# Altium PCB Memory_EEPROM.PcbDoc
Units mil, origin at the board's own origin, x right, y up, seen from the top; angles counter-clockwise.
Board outline 5200 x 2300 mil, 2 copper layers (Top Layer, Bottom Layer); 9 components, 50 nets, 113 pads, 193 vias.
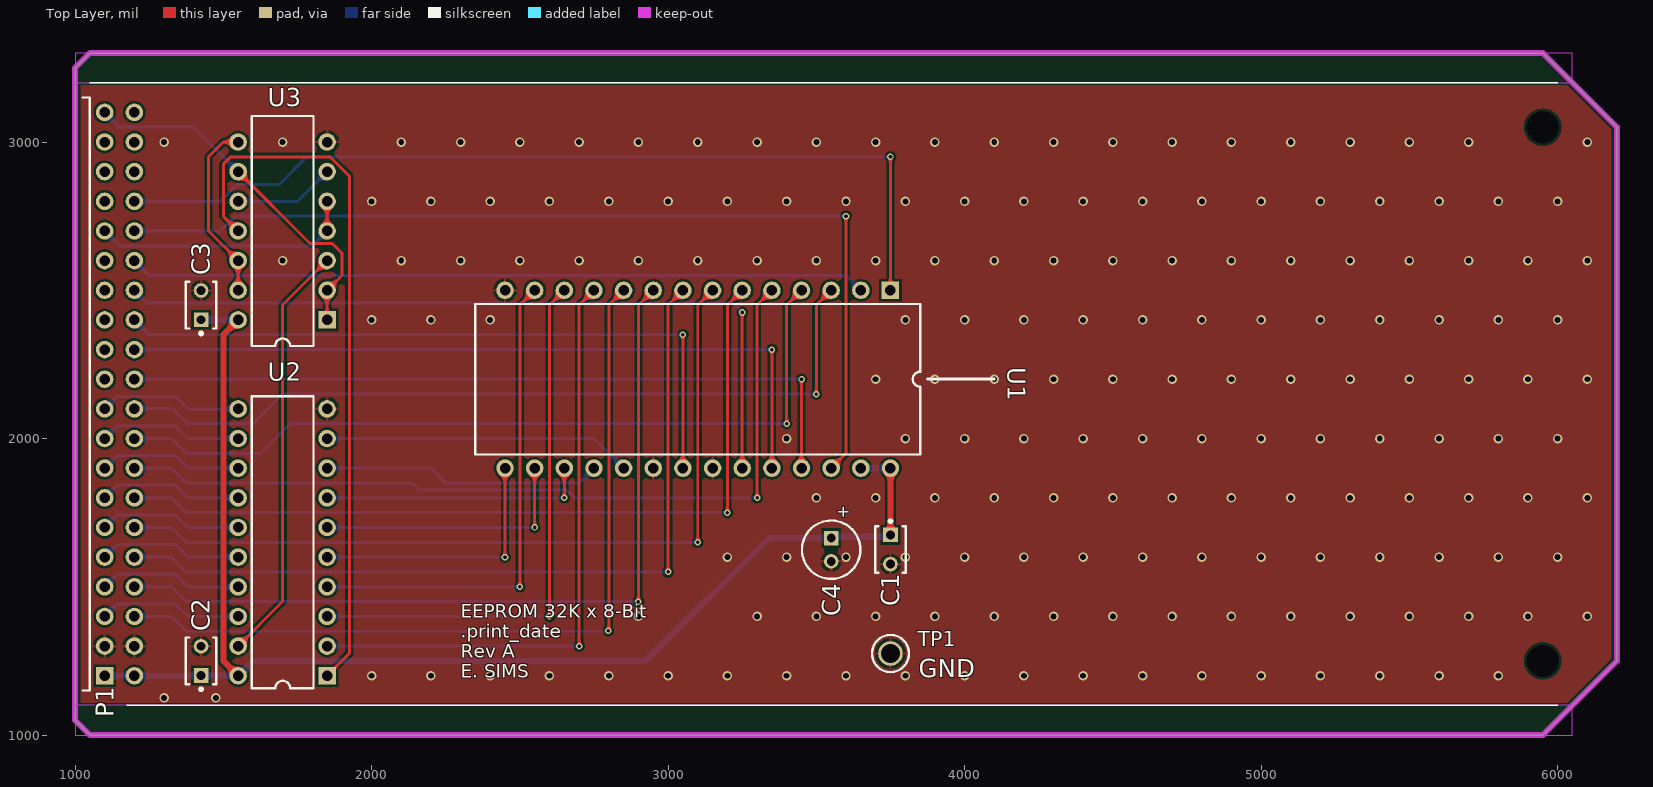
[diagram p0: Top Layer view]
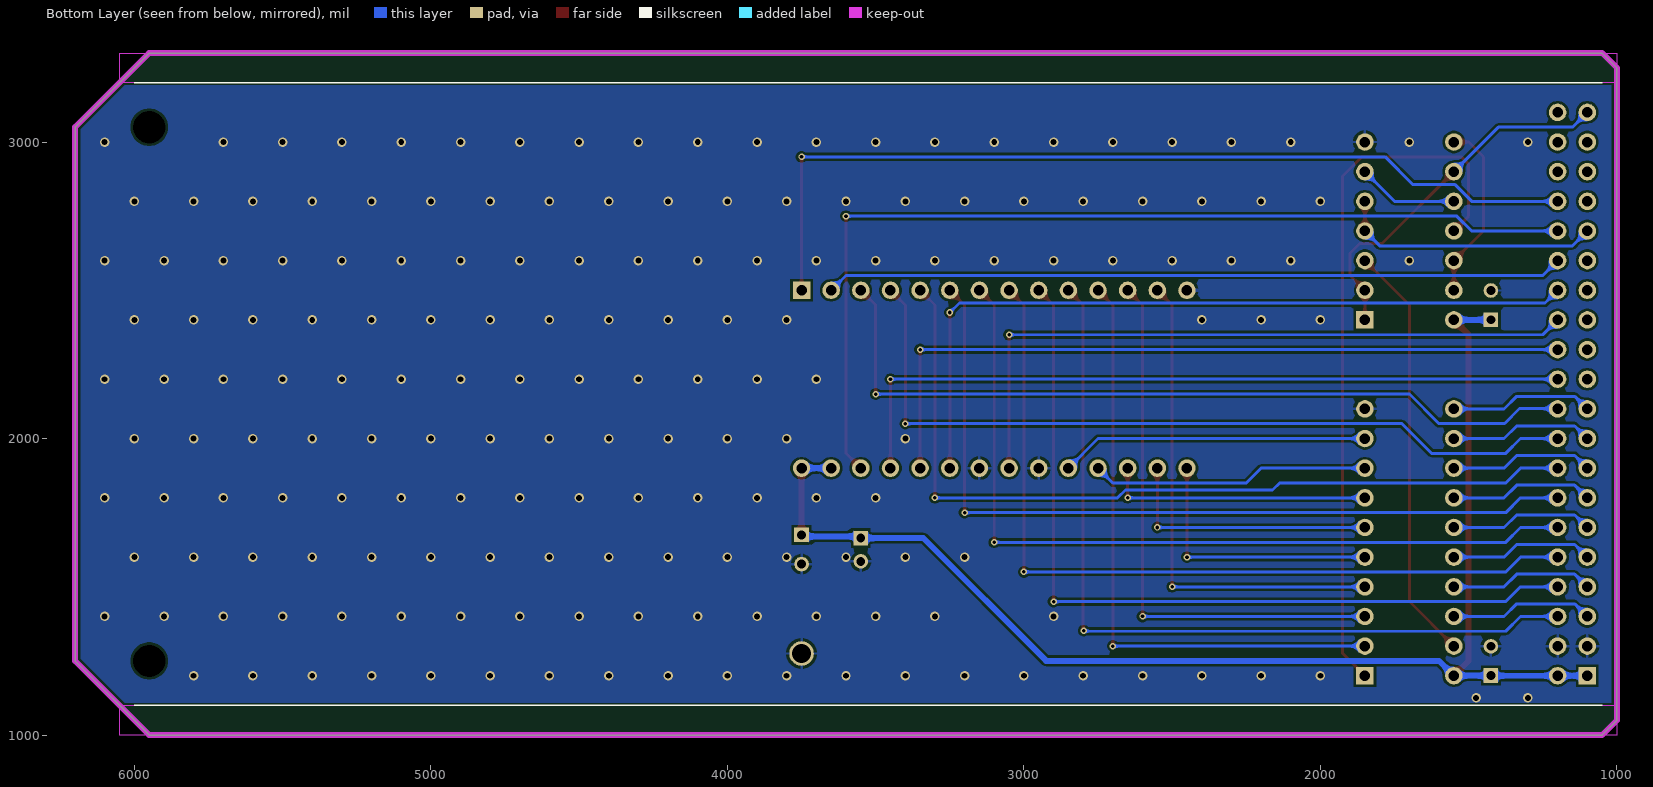
[diagram p1: Bottom Layer view, seen from below]

## Layer stack, top to bottom
Top Solder: solder mask 0.4, Solder Resist, Dk 3.5
Top Layer: signal copper 1.4
Dielectric 1: dielectric 12.6, FR-4, Dk 4.8
Bottom Layer: signal copper 1.4
Bottom Solder: solder mask 0.4, Solder Resist, Dk 3.5

## Board outline
1050,1000 1000,1050 1000,3250 1050,3300 5950,3300 6200,3050 6200,1250 5950,1000

## Design rules (kind name [scope] priority, off if disabled: settings)
Clearance [All] p1: gap=8 ignorepadtopadclearanceinfootprint=FALSE
HoleSize [All] p1: absolutevalues=TRUE maxlimit=200 minlimit=10 maxpercent=80.000 minpercent=20.000
PolygonConnect [All] p1: thpad.connectstyle=Relief thpad.reliefconductorwidth=10 thpad.reliefentries=4 thpad.polygonreliefangle="90 Angle" thpad.airgapwidth=10 smdpad.connectstyle=Relief smdpad.reliefconductorwidth=10 smdpad.reliefentries=4 smdpad.polygonreliefangle="90 Angle" smdpad.airgapwidth=10 via.connectstyle=Direct via.reliefconductorwidth=10 via.reliefentries=4 via.polygonreliefangle="90 Angle" via.airgapwidth=10
RoutingVias "Schematic Routing Via Style" [InNet('GND')] p1: holewidth=20 width=35 viastyle="Through Hole" minholewidth=20 minwidth=35 maxholewidth=20 maxwidth=50
RoutingVias [All] p2: holewidth=28 width=50 viastyle="Through Hole" minholewidth=28 minwidth=50 maxholewidth=28 maxwidth=50
SilkToSilkClearance [All] p1: silktosilkclearance=5
SilkToSolderMaskClearance [IsPad] p1: minsilkscreentomaskgap=5 clearancetoexposedcopper=FALSE
SolderMaskExpansion [All] p1: expansion=4 istentingtop=FALSE
Width "Schematic Width Constraint" [InNet('GND')] p1: maxlimit=50 minlimit=20 preferedwidth=20
Width [All] p2: maxlimit=20 minlimit=10 preferedwidth=10 minimp=50.000000 maximp=50.000000 favimp=50.000000
27 further rules are at their usual default settings.

## Classes and differential pairs
net class PWR: GND
net class BUS[0..7]: BUS0 BUS1 BUS2 BUS3 BUS4 BUS5 BUS6 BUS7
net class ADDR[0..14]: ADDR0 ADDR1 ADDR2 ADDR3 ADDR4 ADDR5 ADDR6 ADDR7 ADDR8 ADDR9 ADDR10 ADDR11 ADDR12 ADDR13 ADDR14
component class Top: C4 P1 TP1
component class MEM: C1 C2 C3 U1 U2 U3

## Components (designator, comment, footprint, x,y, rotation, side; value= is the part's Value field where it differs from the comment)
C1 "K104K15X7RF5TL2" VISH-K104K15X7RF5TL2 3750,1625.79 r270 top
C2 "K104K15X7RF5TL2" VISH-K104K15X7RF5TL2 1425,1250 r90 top
C3 "K104K15X7RF5TL2" VISH-K104K15X7RF5TL2 1425,2450 r90 top
C4 "Cap Pol5" C5x7 3550,1625 r270 top value=10uF
P1 "Header 20X2H" HDR2X20H 1100,1200 r90 top locked
TP1 "GND" KSTN-5011_V 3750,1275 r0 top
U1 "AT28C256-15PU" J028 3100,2200 r180 top
U2 "SN74LS245N" N020 1700,1650 r90 top
U3 "SN74LS00N" N014 1700,2700 r90 top

## Footprints (in the part's own frame and the unit in brackets; to place one, negate y for a bottom-side part, rotate by r counter-clockwise, add the part's x,y. Pads: shape width x height; smd on the part's side, far side on the other; paste and mask are expansions set on the pad)
C5x7 [mm] "Capacitor; 2 Leads"
  rect 1.25x1.25 hole 0.75: 1(-1,0)
  round 1.25 hole 0.75: 2(1,0)
  silkscreen extent -2.5,-2.5 2.5,2.5, body extent -2.5,-2.5 2.5,2.5, height 7
HDR2X20H [mm] "Connector; Header; 20x2 Position; Right Angle"
  rect 1.5x1.5 hole 0.9: 1(0,0)
  round 1.5 hole 0.9: 2(0,-2.54) 3(2.54,0) 4(2.54,-2.54) 5(5.08,0) 6(5.08,-2.54) 7(7.62,0) 8(7.62,-2.54) 9(10.16,0) 10(10.16,-2.54) 11(12.7,0) 12(12.7,-2.54) 13(15.24,0) 14(15.24,-2.54) 15(17.78,0) 16(17.78,-2.54) 17(20.32,0) 18(20.32,-2.54) 19(22.86,0) 20(22.86,-2.54) 21(25.4,0) 22(25.4,-2.54) 23(27.94,0) 24(27.94,-2.54) 25(30.48,0) 26(30.48,-2.54) 27(33.02,0) 28(33.02,-2.54) 29(35.56,0) 30(35.56,-2.54) 31(38.1,0) 32(38.1,-2.54) 33(40.64,0) 34(40.64,-2.54) 35(43.18,0) 36(43.18,-2.54) 37(45.72,0) 38(45.72,-2.54) 39(48.26,0) 40(48.26,-2.54)
  silkscreen extent -1.27,1.27 49.53,1.91
J028 [mm] "DIP; 28 Leads; Row Spacing 15.24 mm; Pitch 2.54 mm"
  rect 1.5x1.5 hole 0.9: 1(-16.51,-7.62)
  round 1.5 hole 0.9: 2(-13.97,-7.62) 3(-11.43,-7.62) 4(-8.89,-7.62) 5(-6.35,-7.62) 6(-3.81,-7.62) 7(-1.27,-7.62) 8(1.27,-7.62) 9(3.81,-7.62) 10(6.35,-7.62) 11(8.89,-7.62) 12(11.43,-7.62) 13(13.97,-7.62) 14(16.51,-7.62) 15(16.51,7.62) 16(13.97,7.62) 17(11.43,7.62) 18(8.89,7.62) 19(6.35,7.62) 20(3.81,7.62) 21(1.27,7.62) 22(-1.27,7.62) 23(-3.81,7.62) 24(-6.35,7.62) 25(-8.89,7.62) 26(-11.43,7.62) 27(-13.97,7.62) 28(-16.51,7.62)
  silkscreen extent -19.05,-6.45 19.05,6.45
KSTN-5011_V [mm] "Test Point, Dia 3.17mm"
  round 2.1 hole 1.6: 1(0,0)
  silkscreen extent -1.59,-1.58 1.59,1.58, body extent -1.59,-1.59 1.59,1.59, height 8.13
N014 [mm] "DIP; 14 Leads; Row Spacing 7.62 mm; Pitch 2.54 mm"
  rect 1.5x1.5 hole 0.9: 1(-7.62,-3.81)
  round 1.5 hole 0.9: 2(-5.08,-3.81) 3(-2.54,-3.81) 4(0,-3.81) 5(2.54,-3.81) 6(5.08,-3.81) 7(7.62,-3.81) 8(7.62,3.81) 9(5.08,3.81) 10(2.54,3.81) 11(0,3.81) 12(-2.54,3.81) 13(-5.08,3.81) 14(-7.62,3.81)
  silkscreen extent -9.85,-2.65 9.85,2.65, body extent -9.15,-5.08 9.15,5.12, height 7.88
N020 [mm] "DIP; 20 Leads; Row Spacing 7.62 mm; Pitch 2.54 mm"
  rect 1.5x1.5 hole 0.9: 1(-11.43,-3.81)
  round 1.5 hole 0.9: 2(-8.89,-3.81) 3(-6.35,-3.81) 4(-3.81,-3.81) 5(-1.27,-3.81) 6(1.27,-3.81) 7(3.81,-3.81) 8(6.35,-3.81) 9(8.89,-3.81) 10(11.43,-3.81) 11(11.43,3.81) 12(8.89,3.81) 13(6.35,3.81) 14(3.81,3.81) 15(1.27,3.81) 16(-1.27,3.81) 17(-3.81,3.81) 18(-6.35,3.81) 19(-8.89,3.81) 20(-11.43,3.81)
  silkscreen extent -12.5,-2.65 12.5,2.65, body extent -13.08,-5.08 13.08,5.12, height 7.88
VISH-K104K15X7RF5TL2 [mm] "THD, 2-Leads, Body 4x2.6mm"
  rect 1.25x1.25 hole 0.75: 1(-1.25,0)
  round 1.25 hole 0.75: 2(1.25,0)
  silkscreen extent -2.55,-1.3 2,1.3, body extent -2,-1.3 2,1.3, height 5.6

## Part data
C1 C2 C3: library part CMP-2000-06508-1, "Ceramic Capacitor, 100 nF, +/- 10%, 50 V, -55 to 125 degC, 2-Pin THD, RoHS, Tape and Reel", Capacitance=0.1µF, Manufacturer=Vishay, Operating Temperature=-55°C~125°C, Package / Case=Radial, Package Description="2-Pin Through Hole Device, Body 4 x 2.6 mm", Ratings=-, Standard Package=1, Temperature Coefficient=X7R, Tolerance=±10%, Voltage - Rated=50V, Applications=GeneralPurpose, Catalog Drawings=Mono-KapSide2-15_5.58Mono-KapSide1_15, Category=Capacitors, Datasheet URL=http://www.vishay.com/docs/45171/kseries.pdf, Datasheet Version=08/2013, Family=CeramicCapacitors, Features=-, Height - Seated (Max)="0.220\"(5.58mm)", Lead Spacing="0.098\"(2.50mm)", Lead Style=Straight, Manufacturer URL=http://www.vishay.com/, Mounting Technology=ThroughHole, Mounting Type=ThroughHole, Online Catalog=Mono-Kap™Series, Other Names=BC1084CT, Package Reference=K104K15X7RF5TL2, Packaging=CutTape(CT), Series=Mono-Kap™K, Size / Dimension="0.157\"Lx0.098\"W(4.00mmx2.50mm)", Thickness (Max)=-
C4: "Polarized Capacitor", LatestRevisionDate=17-Jul-2002, LatestRevisionNote="Re-released for DXP Platform.", PackageDescription="Polarized Capacitor; 2 Leads", PackageReference=POLAR0.8, Published=8-Jun-2000, Publisher="Altium Limited"
P1: "Header, 20-Pin, Dual row, Right Angle", LatestRevisionDate=17-Jul-2002, LatestRevisionNote="Re-released for DXP Platform.", Publisher="Altium Limited", System=Connector
TP1: library part TP
U2: "Octal Bus Transceiver with 3-State Outputs", ComponentLink1Description="Manufacturer Link", ComponentLink1URL=http://www.ti.com/, ComponentLink2Description=Datasheet, ComponentLink2URL=http://www-s.ti.com/sc/ds/sn74ls245.pdf, DatasheetVersion=Mar-1988, LatestRevisionDate=04-Mar-2005, LatestRevisionNote="Stylized 3D Model Added.", PackageDescription="DIP; 20 Leads; Row Spacing 7.62 mm; Pitch 2.54 mm", PackageReference=N020, PackageVersion=Oct-1995, Published=8-Jun-2000, Publisher="Altium Limited"
U3: "Quadruple 2-Input Positive-NAND Gate", ComponentLink1Description="Manufacturer Link", ComponentLink1URL=http://www.ti.com/, ComponentLink2Description=Datasheet, ComponentLink2URL=http://www-s.ti.com/sc/ds/sn74ls00.pdf, DatasheetVersion=Mar-1988, LatestRevisionDate=04-Mar-2005, LatestRevisionNote="Stylized 3D Model Added.", PackageDescription="DIP; 14 Leads; Row Spacing 7.62 mm; Pitch 2.54 mm", PackageReference=N014, PackageVersion=Oct-1995, Published=8-Jun-2000, Publisher="Altium Limited"

## Free pads (board coordinates)
  round 0 hole 109: ""(5950,1250) ""(5950,3050)

## Via types
v1: diameter 32, hole 20, Top Layer to Bottom Layer, tented both sides, 173 vias
v2: diameter 22, hole 12, Top Layer to Bottom Layer, tented both sides, 20 vias

## Nets (pads, with @x,y where several pads share a name; then routed paths per layer and width w, separated by ;. In a path a pad name is that pad's centre, name@x,y a point inside that pad or via, vN(x,y) a via of type N, cw(c..) or ccw(c..) an arc to the next point about the centre after c; other vN are vias at no path point)
ADDR0: P1.6 U1.10 | length 2789.6
  Top Layer w10: v2@2800,1351.85 2800,2450 U1.10
  Bottom Layer w10: P1.6 1325,1400 1375,1350 v2@2800,1350
  other v2: 2798.57,1351.85
ADDR1: P1.8 U1.9 | length 2791.4
  Top Layer w10: v2(2900,1450) 2900,2450 U1.9
  Bottom Layer w10: P1.8 1325,1500 1375,1450 v2(2900,1450)
ADDR2: P1.10 U1.8 | length 2791.4
  Top Layer w10: v2(3000,1550) 3000,2450 U1.8
  Bottom Layer w10: P1.10 1325,1600 1375,1550 v2(3000,1550)
ADDR3: P1.12 U1.7 | length 2791.4
  Top Layer w10: v2(3100,1650) 3100,2450 U1.7
  Bottom Layer w10: P1.12 1325,1700 1375,1650 v2(3100,1650)
ADDR4: P1.14 U1.6 | length 2791.4
  Top Layer w10: v2(3200,1750) 3200,2450 U1.6
  Bottom Layer w10: P1.14 1325,1800 1375,1750 v2(3200,1750)
ADDR5: P1.16 U1.5 | length 2862.1
  Top Layer w10: v2(3300,1800) 3300,2450 U1.5
  Bottom Layer w10: P1.16 1325,1900 1375,1850 2137.5,1850 2161.35,1826.15 2657.79,1826.15 2683.94,1800 v2(3300,1800)
ADDR6: P1.18 U1.4 | length 2732.8
  Top Layer w10: v2(3400,2050) 3400,2450 U1.4
  Bottom Layer w10: P1.18 1325,2000 1375,1950 1625,1950 1725,2050 v2(3400,2050)
ADDR7: P1.20 U1.3 | length 2728.8
  Top Layer w10: v2(3500,2150) 3500,2450 U1.3
  Bottom Layer w10: P1.20@1203.57,2101.08 1328.57,2101.08 1378.57,2051.08 1601.08,2051.08 1700,2150 v2(3500,2150)
ADDR8: P1.22 U1.25 | length 2550
  Top Layer w10: U1.25 v2(3450,2200)
  Bottom Layer w10: P1.22 v2(3450,2200)
ADDR9: P1.24 U1.24 | length 2550
  Top Layer w10: U1.24 v2(3350,2300)
  Bottom Layer w10: P1.24 v2(3350,2300)
ADDR10: P1.26 U1.21 | length 2320.7
  Top Layer w10: U1.21 v2(3050,2350)
  Bottom Layer w10: P1.26 1250,2350 v2(3050,2350)
ADDR11: P1.28 U1.23 | length 2606.1
  Top Layer w10: U1.23 v2(3250,2425)
  Bottom Layer w10: P1.28 1242.53,2457.47 3217.53,2457.47 v2(3250,2425)
ADDR12: P1.30 U1.2 | length 2491.4
  Bottom Layer w10: P1.30 1250,2550 3600,2550 U1.2
ADDR13: P1.32 U1.26 | length 3291.4
  Top Layer w10: U1.26 3600,1950 v2(3600,2750)
  Bottom Layer w10: P1.32 1489.86,2700 1539.86,2750 v2(3600,2750)
ADDR14: P1.34 U1.1 | length 3062.1
  Top Layer w10: U1.1 v2(3750,2950)
  Bottom Layer w10: P1.34 1489.86,2800 1547.33,2857.47 1689.11,2857.47 1781.64,2950 v2(3750,2950)
ADDR15: P1.36
ADDR16: P1.38
ADDR17: P1.40
ADDR18: P1.21
ADDR19: P1.23
BUS0: P1.5 U2.18 | length 485.2
  Bottom Layer w10: P1.5 1142.53,1442.53 1338.29,1442.53 1380.82,1400 U2.18
BUS1: P1.7 U2.17 | length 485.2
  Bottom Layer w10: P1.7 1142.53,1542.53 1338.29,1542.53 1380.82,1500 U2.17
BUS2: P1.9 U2.16 | length 485.2
  Bottom Layer w10: P1.9 1142.53,1642.53 1338.29,1642.53 1380.82,1600 U2.16
BUS3: P1.11 U2.15 | length 485.2
  Bottom Layer w10: P1.11 1142.53,1742.53 1338.29,1742.53 1380.82,1700 U2.15
BUS4: P1.13 U2.14 | length 485.2
  Bottom Layer w10: P1.13 1142.53,1842.53 1338.29,1842.53 1380.82,1800 U2.14
BUS5: P1.15 U2.13 | length 485.2
  Bottom Layer w10: P1.15 1142.53,1942.53 1338.29,1942.53 1380.82,1900 U2.13
BUS6: P1.17 U2.12 | length 485.2
  Bottom Layer w10: P1.17 1142.53,2042.53 1338.29,2042.53 1380.82,2000 U2.12
BUS7: P1.19 U2.11 | length 485.2
  Bottom Layer w10: P1.19 1142.53,2142.53 1338.29,2142.53 1380.82,2100 U2.11
CLK: P1.37
EN: P1.39 U3.1 U3.2 U3.9 | length 1242.5
  Top Layer w10: U3.9 1792.53,2657.47 1867.53,2657.47 1900,2625 1900,2550 U3.2 U3.1
  Bottom Layer w10: P1.39 1150,3050 1400,3050 U3.9
GND: C1.2 C2.2 C3.2 C4.2 P1.3 P1.4 TP1.1 U1.14 U1.20 U1.22 U2.10 U3.7
  other v1: 1300,1125 1475,1125 2000,1200 2200,1200 2400,1200 2600,1200 2800,1200 3000,1200 3200,1200 3400,1200 3600,1200 3800,1200 4000,1200 4200,1200 4400,1200 4600,1200 4800,1200 5000,1200 5200,1200 5400,1200 5600,1200 5800,1200 2900,1400 3300,1400 3500,1400 3700,1400 3900,1400 4100,1400 4300,1400 4500,1400 4700,1400 4900,1400 5100,1400 5300,1400 5500,1400 5700,1400 5900,1400 6100,1400 3200,1600 3400,1600 3600,1600 3800,1600 4000,1600 4200,1600 4400,1600 4600,1600 4800,1600 5000,1600 5200,1600 5400,1600 5600,1600 5800,1600 6000,1600 3500,1800 3700,1800 3900,1800 4100,1800 4300,1800 4500,1800 4700,1800 4900,1800 5100,1800 5300,1800 5500,1800 5700,1800 5900,1800 6100,1800 3400,2000 3800,2000 4000,2000 4200,2000 4400,2000 4600,2000 4800,2000 5000,2000 5200,2000 5400,2000 5600,2000 5800,2000 6000,2000 3700,2200 3900,2200 4100,2200 4300,2200 4500,2200 4700,2200 4900,2200 5100,2200 5300,2200 5500,2200 5700,2200 5900,2200 6100,2200 2000,2400 2200,2400 2400,2400 3800,2400 4000,2400 4200,2400 4400,2400 4600,2400 4800,2400 5000,2400 5200,2400 5400,2400 5600,2400 5800,2400 6000,2400 1700,2600 2100,2600 2300,2600 2500,2600 2700,2600 2900,2600 3100,2600 3300,2600 3500,2600 3700,2600 3900,2600 4100,2600 4300,2600 4500,2600 4700,2600 4900,2600 5100,2600 5300,2600 5500,2600 5700,2600 5900,2600 6100,2600 2000,2800 2200,2800 2400,2800 2600,2800 2800,2800 3000,2800 3200,2800 3400,2800 3600,2800 3800,2800 4000,2800 4200,2800 4400,2800 4600,2800 4800,2800 5000,2800 5200,2800 5400,2800 5600,2800 5800,2800 6000,2800 1300,3000 1700,3000 2100,3000 2300,3000 2500,3000 2700,3000 2900,3000 3100,3000 3300,3000 3500,3000 3700,3000 3900,3000 4100,3000 4300,3000 4500,3000 4700,3000 4900,3000 5100,3000 5300,3000 5500,3000 5700,3000 6100,3000
LOAD: P1.33
NetU2_1: U2.1 U3.11 | length 2424.1
  Top Layer w10: U3.11 1500,2750 1500,2925 1525,2950 1860.14,2950 1925,2885.14 1925,1275 U2.1
NetU2_19: U2.19 U3.3 | length 1424.3
  Top Layer w10: U2.19 1700,1450 1700,2450 U3.3
NetU3_6: U3.6 U3.10 | length 341.4
  Bottom Layer w10: U3.10 1750,2800 U3.6
NetU3_8: U3.8 U3.12 U3.13 | length 612.1
  Top Layer w10: U3.13 U3.12 1450,2700 1450,2950 1500,3000 U3.8
OUT#: P1.31 U3.4 U3.5 | length 891.4
  Top Layer w10: U3.4 U3.5
  Bottom Layer w10: P1.31 1150,2650 1800,2650 U3.4
REG0: U1.11 U2.2 | length 2070.7
  Top Layer w10: v2(2700,1300) 2700,2450 U1.11
  Bottom Layer w10: U2.2 v2(2700,1300)
REG1: U1.12 U2.3 | length 1870.7
  Top Layer w10: v2(2600,1400) 2600,2450 U1.12
  Bottom Layer w10: U2.3 v2(2600,1400)
REG2: U1.13 U2.4 | length 1670.7
  Top Layer w10: v2(2500,1500) 2500,2450 U1.13
  Bottom Layer w10: U2.4 v2(2500,1500)
REG3: U1.15 U2.5 | length 900
  Top Layer w10: v2(2450,1600) U1.15
  Bottom Layer w10: U2.5 v2(2450,1600)
REG4: U1.16 U2.6 | length 900
  Top Layer w10: v2(2550,1700) U1.16
  Bottom Layer w10: U2.6 v2(2550,1700)
REG5: U1.17 U2.7 | length 900
  Top Layer w10: v2(2650,1800) U1.17
  Bottom Layer w10: U2.7 v2(2650,1800)
REG6: U1.18 U2.8 | length 941.4
  Bottom Layer w10: U2.8 2200,1900 2250,1850 2700,1850 U1.18
REG7: U1.19 U2.9 | length 1041.4
  Bottom Layer w10: U2.9 2750,2000 U1.19
RFU_M25: P1.25
RFU_M27: P1.27
RFU_M29: P1.29
RST#: P1.35
VCC: C1.1 C2.1 C3.1 C4.1 P1.1 P1.2 U1.27 U1.28 U2.20 U3.14 | length 4540.2
  Top Layer w20: U2.20 1500,1250 1500,2350 U3.14 ; C1.1 U1.28
  Bottom Layer w20: P1.1 P1.2 1425.79,1200 C2.1@1425.39,1200.39 ; C2.1 C2.1@1425.39,1200.39 ; C3.1 1425.39,2400.39 1549.61,2400.39 U3.14 ; U1.27 U1.28 ; C1.1 3744.69,1669.69 3555.32,1669.69 C4.1 3339.37,1664.37 2925,1250 1600,1250 U2.20 1549.61,1200.39 C2.1@1425.39,1200.39

## Polygon pours and split planes (outlines as drawn)
GND on Top Layer "GND_L01_P000" (solid, remove dead copper, pour order 0): 1000,1000 1000,3300 6200,3300 6200,1000
GND on Bottom Layer "GND_L02_P001" (solid, remove dead copper, pour order 1): 1000,1000 1000,3300 6200,3300 6200,1000

## Keep-outs
Top Layer:
  rectangle: 1000,1000 6050,1100
  rectangle: 1000,3200 6050,3300
Bottom Layer:
  rectangle: 1000,1000 6050,1100
  rectangle: 1000,3200 6050,3300
Keep-Out Layer:
  the board outline again, w20

## Silkscreen, mask and mechanical layers (free items; w line width, h text height)
Top Overlay:
  lines w5: 1050,3200 6000,3200 ; 1175,1100 6000,1100
  lines w10: 3875,2200 4100,2200
  text "EEPROM 32K x 8-Bit / .print_date / Rev A / E. SIMS" at 2300,1193.09 h45
Bottom Overlay:
  lines w5: 1050,1100 6000,1100 ; 1050,3200 6000,3200

## Text inside footprints (layer, text, board x,y; h text height)
C4: Top Overlay "+" at 3609.36,1729.78 h40 r90